# Altium PCB 底座.pcbdoc
Units mil, origin at the board's own origin, x right, y up, seen from the top; angles counter-clockwise.
Board outline 7862.43 x 6611.78 mil, 2 copper layers (Top Layer, Bottom Layer); 31 components, 22 nets, 132 pads, 562 vias.
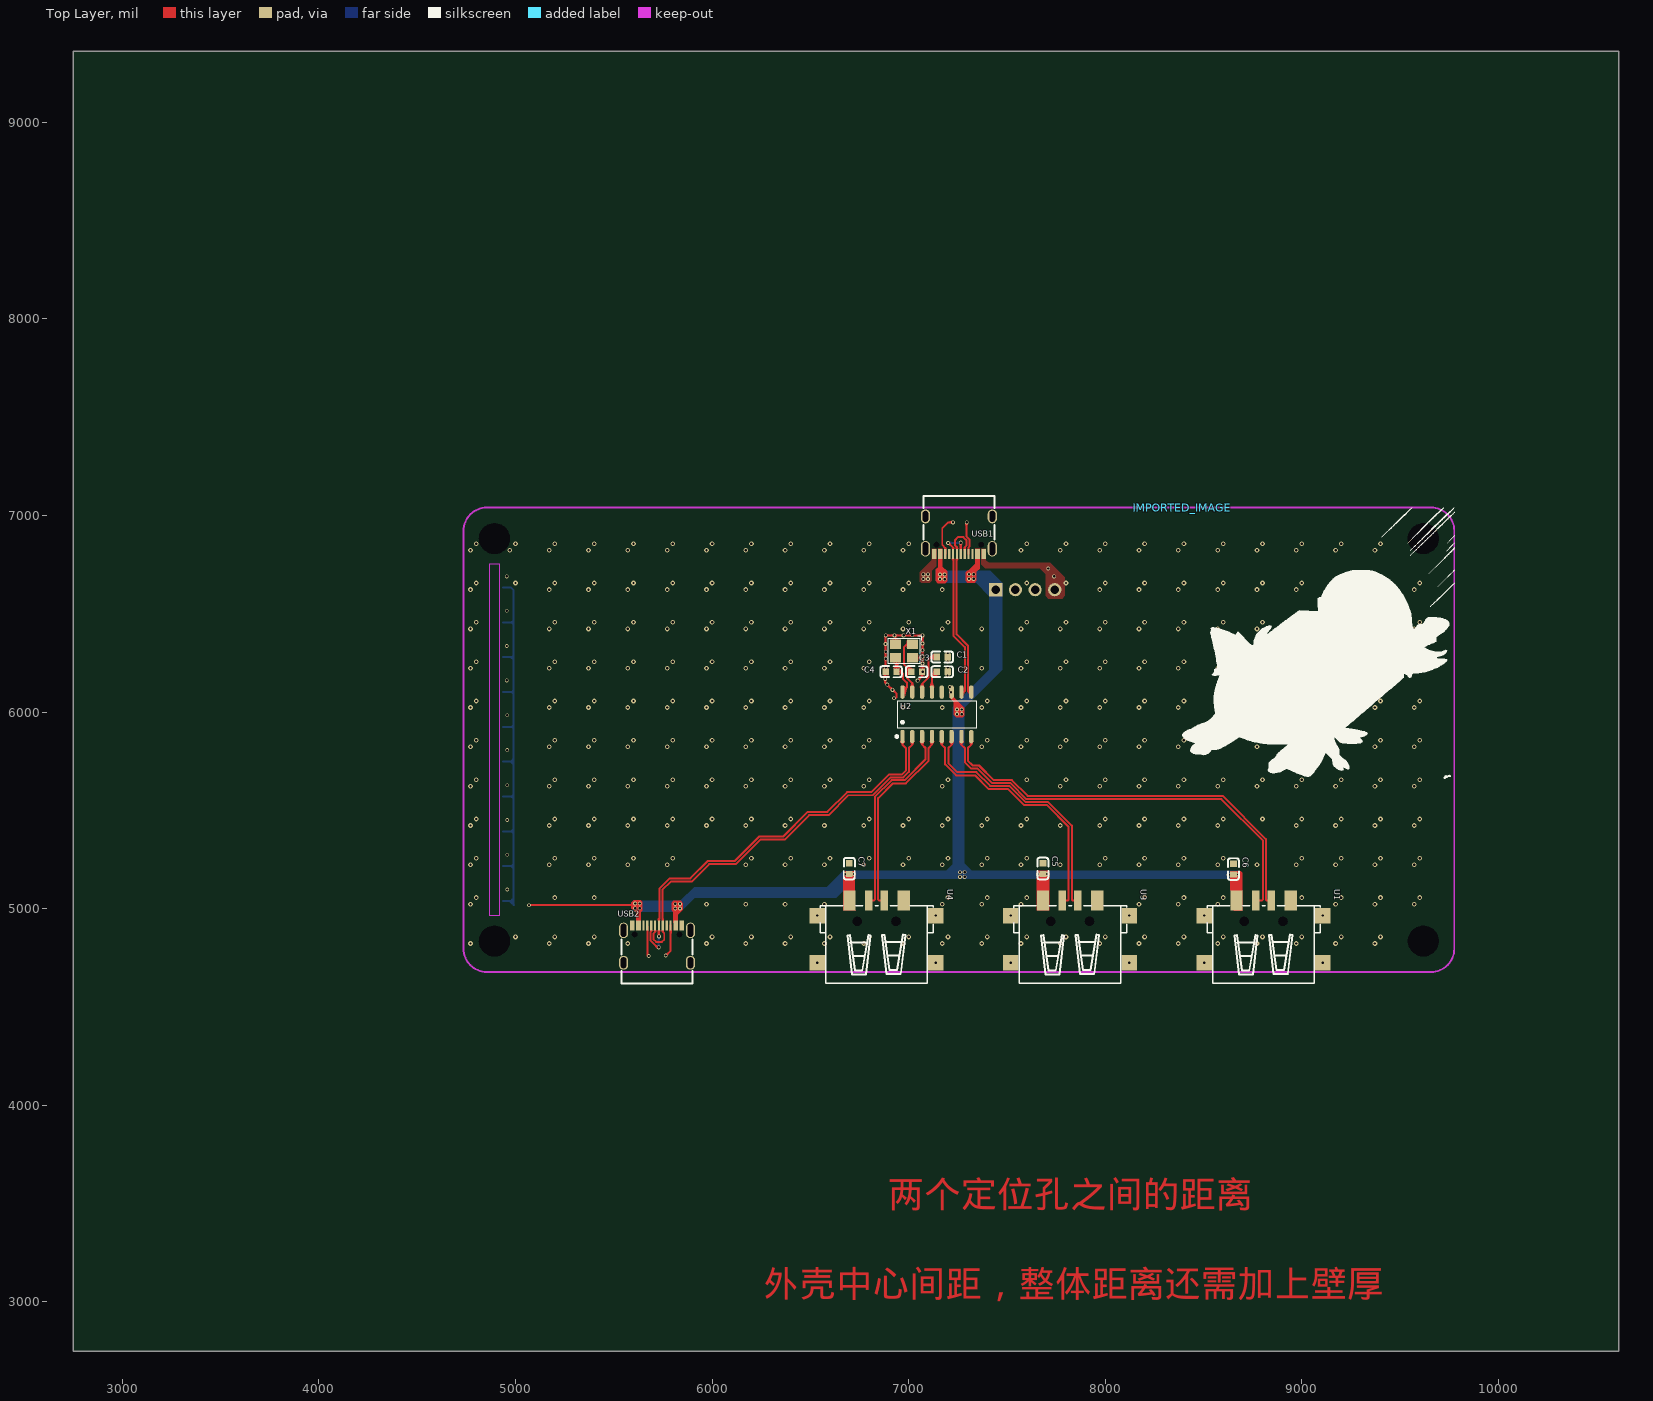
[diagram p0: Top Layer view]
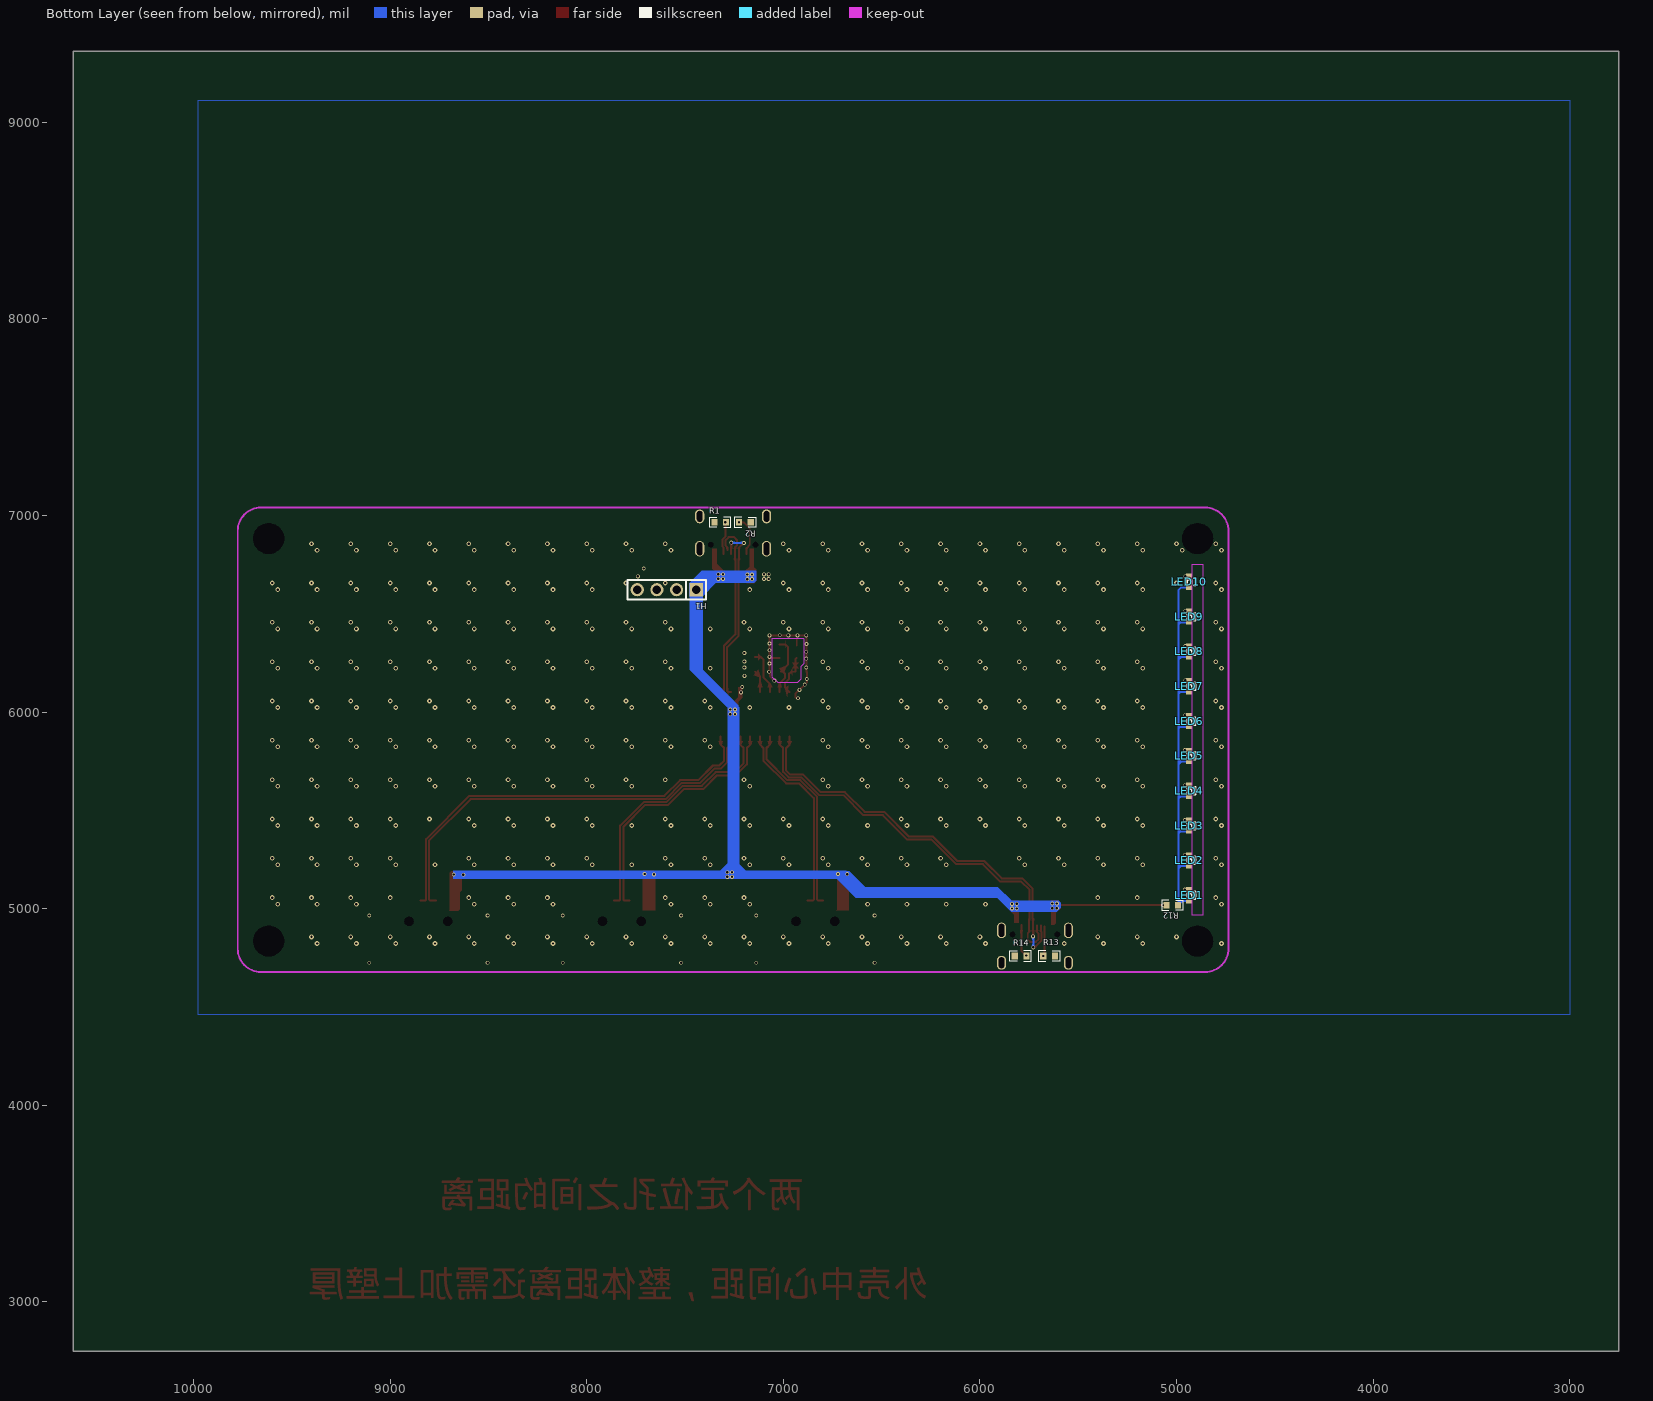
[diagram p1: Bottom Layer view, seen from below]

## Layer stack, top to bottom
Top Layer: signal copper (thickness not stored)
Dielectric: dielectric 12.6, FR-4, Dk 4.8
Bottom Layer: signal copper (thickness not stored)

## Board outline
10612.43,2750 2750,2750 2750,9361.78 10612.43,9361.78
cut-out: 4971.93,6882.52 ccw(c4893.19,6882.52) 4814.45,6882.52 ccw(c4893.19,6882.52)
cut-out: 4971.93,4835.28 ccw(c4893.19,4835.28) 4814.45,4835.28 ccw(c4893.19,4835.28)
cut-out: 9696.34,4835.28 ccw(c9617.6,4835.28) 9538.86,4835.28 ccw(c9617.6,4835.28)
cut-out: 9696.34,6882.52 ccw(c9617.6,6882.52) 9538.86,6882.52 ccw(c9617.6,6882.52)

## Components (designator, comment, footprint, x,y, rotation, side; value= is the part's Value field where it differs from the comment)
C1 "CAP_0603" C0603 7170.71,6280 r0 top
C2 "CAP_0603" C0603 7170.71,6205 r0 top
C3 "CAP_0603" C0603 7040.71,6205 r0 top
C4 "CAP_0603" C0603 6910.71,6205 r0 top
C5 "CAP_0603" C0603 7682.11,5203.75 r270 top
C6 "CAP_0603" C0603 8651.22,5201.04 r270 top
C7 "CAP_0603" C0603 6697.75,5203.43 r270 top
H1 "HDR-M_2.54_1x4P" HDR-TH_4P-P2.54-V-M 7593.04,6622.45 r0 bottom
IMPORTED_IMAGE "IMPORTED_IMAGE" IMPORTED_IMAGE 8390.71,7040 r0 top
LED1 "XL-1606UGC" LED-SMD_L1.7-W1.1-R-RD_GREEN 4936.43,5068.23 r270 bottom
LED2 "XL-1606UGC" LED-SMD_L1.7-W1.1-R-RD_GREEN 4936.43,5245.39 r270 bottom
LED3 "XL-1606UGC" LED-SMD_L1.7-W1.1-R-RD_GREEN 4936.43,5422.56 r270 bottom
LED4 "XL-1606UGC" LED-SMD_L1.7-W1.1-R-RD_GREEN 4936.43,5599.72 r270 bottom
LED5 "XL-1606UGC" LED-SMD_L1.7-W1.1-R-RD_GREEN 4936.43,5776.89 r270 bottom
LED6 "XL-1606UGC" LED-SMD_L1.7-W1.1-R-RD_GREEN 4936.43,5954.06 r270 bottom
LED7 "XL-1606UGC" LED-SMD_L1.7-W1.1-R-RD_GREEN 4936.43,6131.22 r270 bottom
LED8 "XL-1606UGC" LED-SMD_L1.7-W1.1-R-RD_GREEN 4936.43,6308.39 r270 bottom
LED9 "XL-1606UGC" LED-SMD_L1.7-W1.1-R-RD_GREEN 4936.43,6485.55 r270 bottom
LED10 "XL-1606UGC" LED-SMD_L1.7-W1.1-R-RD_GREEN 4936.43,6662.72 r270 bottom
R1 "Res_0603" R0603 7320.71,6965 r180 bottom
R2 "Res_0603" R0603 7195.71,6965 r0 bottom
R12 "Res_0603" R0603 5021.77,5017.79 r0 bottom
R13 "Res_0603" R0603 5648.12,4759.57 r0 bottom
R14 "Res_0603" R0603 5792.76,4759.43 r180 bottom
U1 "USB-SMT-AF10.0-13.1*6.8/6.3" USB-SMT-AF10.0-13.1*6.8/6.3 9066.42,4670 r270 top
U2 "SL2.1A" SOP-16_L10.0-W3.9-P1.27-LS6.0-BL 7143.53,5988.59 r0 top
U3 "USB母座" USB-SMT-AF10.0-13.1*6.8/6.3 8082.17,4670 r270 top
U4 "USB-SMT-AF10.0-13.1*6.8/6.3" USB-SMT-AF10.0-13.1*6.8/6.3 7097.92,4670 r270 top
USB1 "KH-TYPE-C-16P-T" USB-C-SMD_KH-TYPE-C-16P 7255.4,6900 r180 top
USB2 "KH-TYPE-C-16P-T" USB-C-SMD_KH-TYPE-C-16P 5719.97,4820 r0 top
X1 "X322512MSB4SI" OSC-SMD_4P-L3.2-W2.5-BL 6975.71,6310 r180 top

## Footprints (in the part's own frame and the unit in brackets; to place one, negate y for a bottom-side part, rotate by r counter-clockwise, add the part's x,y. Pads: shape width x height; smd on the part's side, far side on the other; paste and mask are expansions set on the pad)
C0603 [mm]
  rect 0.8x0.9 smd mask+0.051: 1(-0.7,0) 2(0.7,0)
  silkscreen extent -1.41,-0.71 1.39,0.72
HDR-TH_4P-P2.54-V-M [mm]
  rect 1.7x1.7 hole 1.1 paste+0 mask+0.051: 1(-3.81,0)
  round 1.7 hole 1.1 paste+0 mask+0.051: 2(-1.27,0) 3(1.27,0) 4(3.81,0)
  silkscreen extent -5.08,-1.27 5.08,1.27
IMPORTED_IMAGE [mil]
  silkscreen extent 0,-1379 1388,0
LED-SMD_L1.7-W1.1-R-RD_GREEN [mm]
  rect 0.6x0.8 smd mask+0.051: 1(0.75,0) 2(-0.75,0)
  silkscreen extent -0.49,-0.25 0.48,0.85
OSC-SMD_4P-L3.2-W2.5-BL [mm]
  rect 1.4x1.2 smd mask+0.051: 1(-1.1,-0.875) 2(1.1,-0.875) 3(1.1,0.875) 4(-1.1,0.875)
  silkscreen extent -2.29,-1.9 2.03,1.65
R0603 [mil]
  rect 31.75x34.02 smd paste-3937.01 mask+2: 1(-29.66,0) 2(29.66,0)
  silkscreen extent -55,-26 55,26
SOP-16_L10.0-W3.9-P1.27-LS6.0-BL [mm]
  oval 0.56x1.745 smd mask+0.051: 1(-4.445,-2.872) 2(-3.175,-2.872) 3(-1.905,-2.872) 4(-0.635,-2.872) 5(0.635,-2.872) 6(1.905,-2.872) 7(3.175,-2.872) 8(4.445,-2.872) 9(4.445,2.872) 10(3.175,2.872) 11(1.905,2.872) 12(0.635,2.872) 13(-0.635,2.872) 14(-1.905,2.872) 15(-3.175,2.872) 16(-4.445,2.872)
  silkscreen extent -5.33,-3.02 5.08,1.77
USB-C-SMD_KH-TYPE-C-16P [mm]
  oval 1.2x2 hole 0.7 slot 1.7 at 90 deg mask+0.051: 1(-4.32,1.765) 2(4.32,1.765)
  oval 1.2x1.8 hole 0.7 slot 1.4 at 90 deg mask+0.051: 3(-4.32,-2.415) 4(4.32,-2.415)
  rect 0.3x1.3 smd paste-100 mask+0.05: A1(-3.35,2.415) A4(-2.55,2.415) A5(-1.25,2.415) A6(-0.25,2.415) A7(0.25,2.415) A8(1.25,2.415) A9(2.55,2.415) A12(3.35,2.415) B1(3.05,2.415) B4(2.25,2.415) B5(1.75,2.415) B6(0.75,2.415) B7(-0.75,2.415) B8(-1.75,2.415) B9(-2.25,2.415) B12(-3.05,2.415)
  Multi-Layer board cut-out: -3.24,1.235 -3.205,1.083 -3.108,0.961 -2.968,0.894 -2.812,0.894 -2.672,0.961 -2.575,1.083 -2.54,1.235 -2.54,1.235 -2.575,1.387 -2.672,1.509 -2.812,1.576 -2.968,1.576 -3.108,1.509 -3.205,1.387 -3.24,1.235
  Multi-Layer board cut-out: 2.54,1.235 2.575,1.083 2.672,0.961 2.812,0.894 2.968,0.894 3.108,0.961 3.205,1.083 3.24,1.235 3.24,1.235 3.205,1.387 3.108,1.509 2.968,1.576 2.812,1.576 2.672,1.509 2.575,1.387 2.54,1.235
  silkscreen extent -4.57,-5.08 4.57,0.57
USB-SMT-AF10.0-13.1*6.8/6.3 [mm]
  rect 2.6x1.6 smd paste+0 mask+0.102: 1(-9.443,-10.134) 4(-9.443,-3.134)
  rect 2.6x1 smd paste+0 mask+0.102: 2(-9.443,-7.634) 3(-9.443,-5.634)
  rect 2x2 smd paste+0 mask+0.102: 5(-7.493,1.016) 6(-1.393,1.016) 7(-1.393,-14.284) 8(-7.493,-14.284)
  Multi-Layer board cut-out: -6.743,-3.534 -7.003,-3.593 -7.212,-3.76 -7.328,-4 -7.328,-4.268 -7.212,-4.508 -7.003,-4.675 -6.743,-4.734 -6.743,-4.734 -6.483,-4.675 -6.274,-4.508 -6.158,-4.268 -6.158,-4 -6.274,-3.76 -6.483,-3.593 -6.743,-3.534
  Multi-Layer board cut-out: -6.743,-8.534 -7.003,-8.593 -7.212,-8.76 -7.328,-9 -7.328,-9.268 -7.212,-9.508 -7.003,-9.675 -6.743,-9.734 -6.743,-9.734 -6.483,-9.675 -6.274,-9.508 -6.158,-9.268 -6.158,-9 -6.274,-8.76 -6.483,-8.593 -6.743,-8.534
  silkscreen extent -8.74,-13.93 1.26,0.67

## Via types
v1: diameter 24, hole 12, Top Layer to Bottom Layer, 470 vias
v2: diameter 19.68, hole 11.81, Top Layer to Bottom Layer, 92 vias

## Nets (pads, with @x,y where several pads share a name; then routed paths per layer and width w, separated by ;. In a path a pad name is that pad's centre, name@x,y a point inside that pad or via, vN(x,y) a via of type N, cw(c..) or ccw(c..) an arc to the next point about the centre after c; other vN are vias at no path point)
1_D+: U1.3 U2.8 | length 2148.6
  Top Layer w10: U2.8 7318.53,5834.15 7301.53,5817.15 7301.53,5751.49 7324.94,5728.08 7357.71,5728.08 7431.68,5654.11 7524.73,5654.11 7605.46,5573.38 8597.28,5573.38 8817.23,5353.43 8817.23,5045.31 8820.77,5041.77 U1.3
1_D-: U1.2 U2.7 | length 2156.6
  Top Layer w10: U2.7 7268.53,5834.15 7285.53,5817.15 7285.53,5744.86 7318.31,5712.08 7350.57,5712.08 7424.54,5638.11 7518.1,5638.11 7598.83,5557.38 8590.65,5557.38 8801.23,5346.8 8801.23,5045.31 8797.69,5041.77 U1.2
2_D+: U2.6 U3.3 | length 1310.8
  Top Layer w10: U2.6 7218.53,5834.15 7201.53,5817.15 7201.53,5740.58 7247.66,5694.45 7343.92,5694.45 7414.27,5624.1 7512.3,5624.1 7593.03,5543.37 7708.36,5543.37 7829.88,5421.85 7829.88,5045.31 7833.41,5041.77 U3.3
2_D-: U2.5 U3.2 | length 1312.6
  Top Layer w10: U2.5 7168.53,5834.15 7185.53,5817.15 7185.53,5733.95 7241.03,5678.45 7337.29,5678.45 7407.64,5608.1 7505.67,5608.1 7586.4,5527.37 7701.73,5527.37 7813.88,5415.22 7813.88,5045.31 7810.34,5041.77 U3.2
3_D+: U2.4 U4.3 | length 1015.1
  Top Layer w10: U4.3 6848.04,5041.77 6844.51,5045.31 6844.51,5561.66 6920.3,5637.46 6985.75,5637.46 7101.53,5753.24 7101.53,5817.15 7118.53,5834.15 U2.4
3_D-: U2.3 U4.2 | length 1014.6
  Top Layer w10: U4.2 6824.97,5041.77 6828.51,5045.31 6828.51,5568.29 6913.68,5653.46 6979.12,5653.46 7085.53,5759.86 7085.53,5817.15 7068.53,5834.15 U2.3
4_D+: U2.2 USB2.A6 USB2.B6 | length 2084.6
  Top Layer w10: USB2.A6 5710.13,4881.7 5701.79,4873.36 5701.79,4844.91 5715.56,4831.14 5744.93,4831.14 5756.77,4842.99 5756.77,4874.07 5749.5,4881.35 USB2.B6 5749.5,4947.64 5747.65,4949.48 5747.65,5095.05 5790.54,5137.94 5896.79,5137.94 5985.21,5226.36 6121.15,5226.36 6245.71,5350.91 6368.85,5350.91 6494.07,5476.13 6593.05,5476.13 6693.66,5576.74 6817.14,5576.74 6907.87,5667.47 6973.32,5667.47 7001.53,5695.68 7001.53,5817.15 7018.53,5834.15 U2.2
4_D-: U2.1 USB2.A7 USB2.B7 | length 2118.9
  Top Layer w10: USB2.B7 5690.44,4884.63 5685.79,4879.99 5685.79,4838.28 5720.96,4803.12 v2(5728.52,4803.12) ; v2(5729.95,4859.09) 5729.95,4914.93 USB2.A7 5729.81,4947.64 5731.65,4949.48 5731.65,5101.68 5783.91,5153.94 5890.16,5153.94 5978.58,5242.36 6114.52,5242.36 6239.08,5366.91 6362.23,5366.91 6487.44,5492.13 6586.42,5492.13 6687.03,5592.74 6810.51,5592.74 6901.24,5683.47 6966.69,5683.47 6985.53,5702.31 6985.53,5817.15 6968.53,5834.15 U2.1
  Bottom Layer w10: v2(5728.52,4803.12) 5728.52,4857.66 v2(5729.95,4859.09)
$1N7576: LED1.1 LED2.1 LED3.1 LED4.1 LED5.1 LED6.1 LED7.1 LED8.1 LED9.1 LED10.1 R12.1 | length 2476.3
  Bottom Layer w10: LED1.1 4971.2,5038.69 ; LED2.1 4978.93,5215.86 ; LED3.1 4978.61,5393.02 ; LED4.1 4979.56,5570.19 ; LED5.1 4974.94,5747.36 ; LED6.1 4980.11,5924.52 ; LED7.1 4980.11,6101.69 ; LED8.1 4976.93,6278.85 ; LED9.1 4978.75,6456.02 ; LED10.1 4977.53,6633.18 4990.71,6620 4990.71,6467.71 ; R12.1 R12.1@4990.71,5019.18 ; 4971.2,5038.69 4976.73,5038.69 4984.86,5046.82 ; 4971.2,5038.69 R12.1@4984.86,5025.04 ; 4974.94,5747.36 4990.44,5731.85 4990.71,5731.85 ; 4974.94,5747.36 4990.71,5747.36 ; 4974.94,5747.36 4988.17,5760.58 4990.71,5760.58 ; 4976.93,6278.85 4990.71,6265.06 ; 4976.93,6278.85 4980.35,6278.85 ; 4978.61,5393.02 4990.71,5380.92 ; 4978.61,5393.02 4990.71,5393.02 ; 4978.61,5393.02 4990.71,5405.13 ; 4978.75,6456.02 4990.71,6444.05 ; 4978.75,6456.02 4979.02,6456.02 ; 4978.93,5215.86 4990.71,5204.07 ; 4978.93,5215.86 4990.71,5215.86 ; 4978.93,5215.86 4990.49,5227.41 4990.71,5227.41 ; 4979.02,6456.02 4990.71,6467.71 ; 4979.02,6456.02 4990.71,6456.02 ; 4979.56,5570.19 4990.71,5559.04 ; 4979.56,5570.19 4990.71,5570.19 ; 4979.56,5570.19 4990.71,5581.34 ; 4980.11,5924.52 4990.71,5913.92 ; 4980.11,5924.52 4990.71,5924.52 ; 4980.11,5924.52 4990.71,5935.12 ; 4980.11,6101.69 4990.71,6091.08 ; 4980.11,6101.69 4990.71,6101.69 ; 4980.11,6101.69 4990.71,6112.29 ; 4980.35,6278.85 4990.71,6289.22 ; 4980.35,6278.85 4990.71,6278.85 ; R12.1@4984.86,5025.04 4984.86,5046.82 ; R12.1@4984.86,5025.04 R12.1@4990.71,5019.18 ; 4984.86,5046.82 4990.71,5052.68 ; R12.1@4990.71,5019.18 4990.71,5052.68 ; 4990.71,5052.68 4990.71,5204.07 ; 4990.71,5204.07 4990.71,5215.86 ; 4990.71,5215.86 4990.71,5227.41 ; 4990.71,5227.41 4990.71,5380.92 ; 4990.71,5380.92 4990.71,5393.02 ; 4990.71,5393.02 4990.71,5405.13 ; 4990.71,5405.13 4990.71,5559.04 ; 4990.71,5559.04 4990.71,5570.19 ; 4990.71,5570.19 4990.71,5581.34 ; 4990.71,5581.34 4990.71,5731.85 ; 4990.71,5731.85 4990.71,5747.36 ; 4990.71,5747.36 4990.71,5760.58 ; 4990.71,5760.58 4990.71,5913.92 ; 4990.71,5913.92 4990.71,5924.52 ; 4990.71,5924.52 4990.71,5935.12 ; 4990.71,5935.12 4990.71,6091.08 ; 4990.71,6091.08 4990.71,6101.69 ; 4990.71,6101.69 4990.71,6112.29 ; 4990.71,6112.29 4990.71,6265.06 ; 4990.71,6265.06 4990.71,6278.85 ; 4990.71,6278.85 4990.71,6289.22 ; 4990.71,6289.22 4990.71,6444.05 ; 4990.71,6444.05 4990.71,6456.02 ; 4990.71,6456.02 4990.71,6467.71
+5V: C5.2 C6.2 C7.2 H1.1 R12.2 U1.1 U2.11 U3.1 U4.1 USB1.A4 USB1.A9 USB1.B4 USB1.B9 USB2.A4 USB2.A9 USB2.B4 USB2.B9 | length 529
  Top Layer w10: v2(5068.51,5017.45) 5594.01,5017.45 ; v2(7215.71,6100) 7216.84,6100 U2.11
  other v2: 5812.85,5000.86 5836.48,5000.86 5608.83,5002.31 5632.45,5002.31 5812.85,5024.48 5836.48,5024.48 5608.83,5025.93 5632.45,5025.93 7261.11,5161.47 7284.73,5161.47 8627.38,5172.32 8676.24,5174.02 7658.08,5174.57 6675.01,5175.54 6722.11,5176.06 7705.58,5175.94 7261.11,5185.09 7284.73,5185.09 7246.06,5989.38 7269.68,5989.38 7246.06,6013 7269.68,6013 7208.72,6127.27 7159.24,6676.09 7182.87,6676.09 7306.88,6677.28 7330.5,6677.28 7159.24,6699.72 7182.87,6699.72 7306.88,6700.9 7330.5,6700.9
CC1: R1.2 USB1.A5 | length 173.4
  Top Layer w10: v2(7295.71,6965) 7293.98,6963.27 7293.98,6893.27 7308.89,6878.36 7308.89,6842.28 7304.61,6838 USB1.A5
  Bottom Layer w10: R1.2 v2(7295.71,6965)
CC1_#: R13.2 USB2.A5 | length 154.4
  Top Layer w10: USB2.A5@5670.38,4910.15 5670.38,4766.63 v2(5678.07,4758.94)
CC2: R2.2 USB1.B5 | length 204.4
  Top Layer w10: USB1.B5 7186.5,6834.22 7170.71,6850 7170.71,6935 7200.71,6965 v2(7225.71,6965)
  Bottom Layer w10: R2.2 v2(7225.71,6965)
CC2_#: R14.2 USB2.B5 | length 165.7
  Top Layer w10: v2(5764.69,4761.51) 5789.47,4786.28 USB2.B5@5789.47,4916.99
GND: C1.2 C2.2 C3.2 C4.1 C5.1 C6.1 C7.1 H1.4 LED1.2 LED2.2 LED3.2 LED4.2 LED5.2 LED6.2 LED7.2 LED8.2 LED9.2 LED10.2 R1.1 R2.1 R13.1 R14.1 U1.4 U1.5 U1.6 U1.7 U1.8 U2.12 U3.4 U3.5 U3.6 U3.7 U3.8 U4.4 U4.5 U4.6 U4.7 U4.8 USB1.1 USB1.2 USB1.3 USB1.4 USB1.A1 USB1.A12 USB1.B1 USB1.B12 USB2.1 USB2.2 USB2.3 USB2.4 USB2.A1 USB2.A12 USB2.B1 USB2.B12 X1.2 X1.4 | length 874.4
  Top Layer w10: X1.2@6931.76,6339.56 6931.76,6386.18 v2(6927.94,6390) ; 6938.27,6075 6938.27,6092.44 v2(6917.82,6112.9) v2(6891.1,6139.61) 6880.71,6150 v2(6880.71,6168.49) 6880.71,6202.56 C4.1 v2(6883.15,6226.61) v2(6883.15,6271.61) v2(6883.15,6306.76) 6882.11,6307.8 v2(6882.11,6346.39) 6882.11,6388.96 v2(6883.15,6390) v2(6927.94,6390) ; X1.4@7019.32,6275.36 7065.56,6275.36 v2(7070.71,6280.51) ; v2(7045.71,6160) 7068.27,6182.56 C3.2 7070.71,6207.44 v2(7070.71,6247.23) v2(7070.71,6280.51) ; v2(6927.94,6390) v2(6974.19,6390) 6974.5,6390.31 v2(7017.93,6390.31) 7070.4,6390.31 v2(7070.71,6390) v2(7070.71,6348.48) v2(7070.71,6314.26) v2(7070.71,6280.51)
  other v1: 4771.44,4822.97 5171.44,4822.97 5371.44,4822.97 5571.44,4822.97 5971.44,4822.97 6171.44,4822.97 6371.44,4822.97 6571.44,4822.97 6771.44,4822.97 6971.44,4822.97 7171.44,4822.97 7371.44,4822.97 7571.44,4822.97 7771.44,4822.97 7971.44,4822.97 8171.44,4822.97 8371.44,4822.97 8571.44,4822.97 8771.44,4822.97 8971.44,4822.97 9171.44,4822.97 9371.44,4822.97 5000,4856.35 5200,4856.35 5400,4856.35 6000,4856.35 6200,4856.35 6400,4856.35 6600,4856.35 6800,4856.35 7000,4856.35 7200,4856.35 7400,4856.35 7600,4856.35 7800,4856.35 8000,4856.35 8200,4856.35 8400,4856.35 8600,4856.35 8800,4856.35 9000,4856.35 9200,4856.35 9400,4856.35 4771.44,5022.97 5971.44,5022.97 6171.44,5022.97 6371.44,5022.97 6571.44,5022.97 7171.44,5022.97 7371.44,5022.97 7571.44,5022.97 8171.44,5022.97 8371.44,5022.97 8571.44,5022.97 9171.44,5022.97 9371.44,5022.97 9571.44,5022.97 4800,5056.35 5200,5056.35 5400,5056.35 7200,5056.35 7400,5056.35 7600,5056.35 8200,5056.35 8400,5056.35 8600,5056.35 9000,5056.35 9200,5056.35 9400,5056.35 9600,5056.35 4771.44,5222.97 5171.44,5222.97 5371.44,5222.97 5571.44,5222.97 5771.44,5222.97 6171.44,5222.97 6371.44,5222.97 6571.44,5222.97 6771.44,5222.97 6971.44,5222.97 7171.44,5222.97 7371.44,5222.97 7571.44,5222.97 7771.44,5222.97 7971.44,5222.97 8171.44,5222.97 8371.44,5222.97 8571.44,5222.97 8771.44,5222.97 8971.44,5222.97 9171.44,5222.97 9371.44,5222.97 9571.44,5222.97 4800,5256.35 5200,5256.35 5400,5256.35 5600,5256.35 5800,5256.35 6200,5256.35 6400,5256.35 6600,5256.35 6800,5256.35 7000,5256.35 7200,5256.35 7400,5256.35 7600,5256.35 8000,5256.35 8200,5256.35 8400,5256.35 8600,5256.35 9000,5256.35 9200,5256.35 9400,5256.35 9600,5256.35 4771.44,5422.97 5171.44,5422.97 5371.44,5422.97 5571.44,5422.97 5771.44,5422.97 5971.44,5422.97 6171.44,5422.97 6371.44,5422.97 6571.44,5422.97 6771.44,5422.97 6971.44,5422.97 7171.44,5422.97 7371.44,5422.97 7571.44,5422.97 7771.44,5422.97 7971.44,5422.97 8171.44,5422.97 8371.44,5422.97 8571.44,5422.97 8971.44,5422.97 9171.44,5422.97 9371.44,5422.97 9571.44,5422.97 4800,5456.35 5200,5456.35 5400,5456.35 5600,5456.35 5800,5456.35 6000,5456.35 6200,5456.35 6400,5456.35 6800,5456.35 7000,5456.35 7200,5456.35 7400,5456.35 7600,5456.35 8000,5456.35 8200,5456.35 8400,5456.35 8600,5456.35 8800,5456.35 9000,5456.35 9200,5456.35 9400,5456.35 9600,5456.35 4771.44,5622.97 5171.44,5622.97 5371.44,5622.97 5571.44,5622.97 5771.44,5622.97 5971.44,5622.97 6171.44,5622.97 6371.44,5622.97 6571.44,5622.97 6771.44,5622.97 7171.44,5622.97 7771.44,5622.97 7971.44,5622.97 8171.44,5622.97 8371.44,5622.97 8571.44,5622.97 8771.44,5622.97 8971.44,5622.97 9171.44,5622.97 9371.44,5622.97 9571.44,5622.97 4800,5656.35 5200,5656.35 5400,5656.35 5600,5656.35 5800,5656.35 6000,5656.35 6200,5656.35 6400,5656.35 6600,5656.35 6800,5656.35 7200,5656.35 7600,5656.35 7800,5656.35 8000,5656.35 8200,5656.35 8400,5656.35 8600,5656.35 8800,5656.35 9000,5656.35 9200,5656.35 9400,5656.35 9600,5656.35 4771.44,5822.97 5171.44,5822.97 5371.44,5822.97 5571.44,5822.97 5771.44,5822.97 5971.44,5822.97 6171.44,5822.97 6371.44,5822.97 6571.44,5822.97 6771.44,5822.97 7371.44,5822.97 7571.44,5822.97 7771.44,5822.97 7971.44,5822.97 8171.44,5822.97 8371.44,5822.97 8571.44,5822.97 8771.44,5822.97 8971.44,5822.97 9171.44,5822.97 9371.44,5822.97 9571.44,5822.97 4800,5856.35 5200,5856.35 5400,5856.35 5600,5856.35 5800,5856.35 6000,5856.35 6200,5856.35 6400,5856.35 6600,5856.35 6800,5856.35 7400,5856.35 7600,5856.35 7800,5856.35 8000,5856.35 8200,5856.35 8400,5856.35 8600,5856.35 8800,5856.35 9000,5856.35 9200,5856.35 9400,5856.35 9600,5856.35 4771.44,6022.97 5171.44,6022.97 5371.44,6022.97 5571.44,6022.97 5771.44,6022.97 5971.44,6022.97 6171.44,6022.97 6371.44,6022.97 6571.44,6022.97 6771.44,6022.97 6971.44,6022.97 7171.44,6022.97 7371.44,6022.97 7571.44,6022.97 7771.44,6022.97 7971.44,6022.97 8171.44,6022.97 8371.44,6022.97 8571.44,6022.97 8771.44,6022.97 8971.44,6022.97 9171.44,6022.97 9371.44,6022.97 9571.44,6022.97 4800,6056.35 5200,6056.35 5400,6056.35 5600,6056.35 5800,6056.35 6000,6056.35 6200,6056.35 6400,6056.35 6600,6056.35 6800,6056.35 7400,6056.35 7600,6056.35 7800,6056.35 8000,6056.35 8200,6056.35 8400,6056.35 8600,6056.35 8800,6056.35 9000,6056.35 9200,6056.35 9400,6056.35 9600,6056.35 4771.44,6222.97 5171.44,6222.97 5371.44,6222.97 5571.44,6222.97 5771.44,6222.97 5971.44,6222.97 6171.44,6222.97 6371.44,6222.97 6571.44,6222.97 6771.44,6222.97 7371.44,6222.97 7571.44,6222.97 7771.44,6222.97 7971.44,6222.97 8171.44,6222.97 8371.44,6222.97 8571.44,6222.97 8771.44,6222.97 8971.44,6222.97 9171.44,6222.97 9371.44,6222.97 9571.44,6222.97 4800,6256.35 5200,6256.35 5400,6256.35 5600,6256.35 5800,6256.35 6000,6256.35 6200,6256.35 6400,6256.35 6600,6256.35 6800,6256.35 7600,6256.35 7800,6256.35 8000,6256.35 8200,6256.35 8400,6256.35 8600,6256.35 8800,6256.35 9000,6256.35 9200,6256.35 9400,6256.35 9600,6256.35 4771.44,6422.97 5171.44,6422.97 5371.44,6422.97 5571.44,6422.97 5771.44,6422.97 5971.44,6422.97 6171.44,6422.97 6371.44,6422.97 6571.44,6422.97 6771.44,6422.97 6971.44,6422.97 7171.44,6422.97 7371.44,6422.97 7571.44,6422.97 7771.44,6422.97 7971.44,6422.97 8171.44,6422.97 8371.44,6422.97 8571.44,6422.97 8771.44,6422.97 8971.44,6422.97 9171.44,6422.97 9371.44,6422.97 9571.44,6422.97 4800,6456.35 5200,6456.35 5400,6456.35 5600,6456.35 5800,6456.35 6000,6456.35 6200,6456.35 6400,6456.35 6600,6456.35 6800,6456.35 7000,6456.35 7200,6456.35 7600,6456.35 7800,6456.35 8000,6456.35 8200,6456.35 8400,6456.35 8600,6456.35 8800,6456.35 9000,6456.35 9200,6456.35 9400,6456.35 9600,6456.35 4771.44,6622.97 5171.44,6622.97 5371.44,6622.97 5571.44,6622.97 5771.44,6622.97 5971.44,6622.97 6171.44,6622.97 6371.44,6622.97 6571.44,6622.97 6771.44,6622.97 6971.44,6622.97 7171.44,6622.97 7971.44,6622.97 8171.44,6622.97 8371.44,6622.97 8571.44,6622.97 8771.44,6622.97 8971.44,6622.97 9171.44,6622.97 9371.44,6622.97 9571.44,6622.97 4800,6656.35 5000,6656.35 5200,6656.35 5400,6656.35 5600,6656.35 5800,6656.35 6000,6656.35 6200,6656.35 6400,6656.35 6600,6656.35 6800,6656.35 7000,6656.35 7600,6656.35 7800,6656.35 8000,6656.35 8200,6656.35 8400,6656.35 8600,6656.35 8800,6656.35 9000,6656.35 9200,6656.35 9400,6656.35 9600,6656.35 4771.44,6822.97 4971.44,6822.97 5171.44,6822.97 5371.44,6822.97 5571.44,6822.97 5771.44,6822.97 5971.44,6822.97 6171.44,6822.97 6371.44,6822.97 6571.44,6822.97 6771.44,6822.97 6971.44,6822.97 7571.44,6822.97 7771.44,6822.97 7971.44,6822.97 8171.44,6822.97 8371.44,6822.97 8571.44,6822.97 8771.44,6822.97 8971.44,6822.97 9171.44,6822.97 9371.44,6822.97 4800,6856.35 5000,6856.35 5200,6856.35 5400,6856.35 5600,6856.35 5800,6856.35 6000,6856.35 6200,6856.35 6400,6856.35 6600,6856.35 6800,6856.35 7000,6856.35 7600,6856.35 7800,6856.35 8000,6856.35 8200,6856.35 8400,6856.35 8600,6856.35 8800,6856.35 9000,6856.35 9200,6856.35 9400,6856.35
  other v2: 6535.56,4724.84 7137.92,4724.84 7519.81,4724.84 8122.17,4724.84 8504.06,4724.84 9106.42,4724.84 6535.56,4965 7137.92,4965 7519.81,4965 8122.17,4965 8504.06,4965 9106.42,4965 4957.96,5097.59 4957.96,5273.97 4957.96,5450.81 4957.96,5627.65 4957.96,5806.42 4957.96,5983.58 6925.71,6070 4955.71,6161.1 7197.5,6183.96 7072.21,6205 7198.27,6226.25 7198.27,6257.29 7198.27,6300.41 4955.71,6336.36 4955.71,6515 7074.83,6676.48 7098.45,6676.48 4955.71,6690 7739.99,6690 7074.83,6700.11 7098.45,6700.11 7710.09,6730.42
IN_D+: U2.10 USB1.A6 USB1.B6 | length 931.7
  Top Layer w10: v2(7200.71,6860) 7225.87,6834.85 USB1.B6 7225.87,6772.36 7227.71,6770.52 7227.71,6388.55 7285.85,6330.42 7285.85,6106.63 7282.31,6103.09 U2.10@7265.71,6103.09 ; v2(7264.83,6861.49) 7265.24,6861.08 USB1.A6
  Bottom Layer w10: v2(7200.71,6860) 7263.34,6860 v2(7264.83,6861.49)
IN_D-: U2.9 USB1.A7 USB1.B7 | length 938
  Top Layer w10: USB1.B7@7284.32,6823.39 7284.32,6837.53 7294.88,6848.09 7294.88,6872.55 7278.21,6889.22 7250.44,6889.22 7235.56,6874.34 7235.56,6848.87 7245.56,6838.87 USB1.A7 7245.56,6772.36 7243.71,6770.52 7243.71,6395.17 7301.85,6337.04 7301.85,6106.63 7305.38,6103.09 U2.9@7315.71,6103.09
VDD18: C1.1 U2.14 | length 225.3
  Top Layer w10: U2.14 7068.53,6143.03 7100.71,6175.22 7100.71,6265 7115.71,6280 C1.1
VDD33: C2.1 U2.13 | length 113.5
  Top Layer w10: U2.13 7118.53,6180.37 C2.1
XIN: C4.2 U2.16 X1.3 | length 220.4
  Top Layer w10: X1.3 6938.27,6269.68 C4.2 6960.71,6205 6970.71,6195 6970.71,6170 6990.71,6150 6990.71,6123.87 U2.16
XOUT: C3.1 U2.15 X1.1 | length 321.2
  Top Layer w10: U2.15 7018.53,6147.19 6990.71,6175 6990.71,6195 7000.71,6205 C3.1 6975.71,6242.44 6975.71,6330 6990.16,6344.45 X1.1
"": H1.2 H1.3 USB1.A8 USB1.B8 USB2.A8 USB2.B8

## Polygon pours and split planes (outlines as drawn)
GND on Top Layer (hatched 45Degree grid 20 track 10, remove dead copper, pour order 0): 4411.44,4222.97 10362.43,4222.97 10362.43,7966.95 4411.44,7966.95
GND on Bottom Layer (solid, remove dead copper, pour order 1): 3000,4461.35 9975.67,4461.35 9975.67,9111.78 3000,9111.78

## Keep-outs
Top Layer:
  region net "": 4865.56,4965.43 4920.05,4965.43 4920.05,6752.99 4865.56,6752.99
Bottom Layer:
  region net "": 4865.56,4965.43 4920.05,4965.43 4920.05,6752.99 4865.56,6752.99
  region net "": 6896.89,6373.52 6896.89,6245.16 6896.74,6245.01 6911.75,6230 6911.75,6166.95 6929.86,6148.84 7026.57,6148.84 7055.27,6177.54 7055.27,6374.33 7054.67,6374.94 6898.3,6374.94 6896.94,6373.58
Board Outline Layer:
  lines w10 net "": 4735.71,4795.91 ccw(c4853.82,4795.91) 4853.82,4677.8 9656.97,4677.8 ccw(c9656.97,4795.91) 9775.08,4795.91 9775.08,6921.89 ccw(c9656.97,6921.89) 9656.97,7040 4853.82,7040 ccw(c4853.82,6921.89) 4735.71,6921.89 4735.71,4795.91

## Other copper
Top Layer:
  region net +5V: 7149.67,6830.69 7149.8,6830.69 7149.76,6830.74
  region net +5V: 7149.8,6830.69 7171.89,6830.69 7172.03,6830.83 7172.03,6738.82 7195.83,6715.02 7195.83,6665.16 7186.95,6656.28 7149.03,6656.28 7138.41,6666.9 7138.41,6725.23 7150.28,6737.11 7150.28,6830.21
  region net +5V: 7338.67,6830.28 7360.61,6830.28 7360.61,6729.15 7344.18,6712.71 7344.18,6666.67 7335.64,6658.13 7298.76,6658.13 7289.18,6667.71 7289.18,6710.42 7296.68,6717.92 7301.89,6717.92 7339.18,6755.21 7339.18,6829.72 7338.66,6830.25
  region net +5V: 7208.72,6127.26 7228.76,6127.26 7229.37,6126.66 7229.37,6075.25 7282.6,6022.01 7282.6,5980.55 7274.86,5972.81 7240.91,5972.81 7228.61,5985.11 7228.61,6052.21 7208.72,6072.1
  region net +5V: 6679.74,5191.48 6725.99,5191.48 6726.9,5190.57 6726.9,4993.97 6729.64,4991.23 6669.72,4991.23 6668.13,4992.83 6668.13,5182.82 6676.55,5191.25 6679.97,5191.25
  region net +5V: 6679.97,5191.25 6684.76,5191.25 6686.58,5189.43 6681.79,5189.43
  region net +5V: 7652.77,4990.76 7714.28,4990.76 7714.96,4991.44 7714.96,5193.28 7714.5,5193.74 7655.96,5193.74 7652.08,5189.87 7652.08,4991.44
  region net +5V: 8634.3,5189.98 8634.43,5189.98 8634.35,5190.05
  region net +5V: 8634.43,5189.98 8689.89,5189.98 8697.4,5182.46 8697.4,4991.32 8698.31,4990.41 8652.98,4990.41 8645.46,4997.93 8645.46,5083.36 8635.67,5093.16 8635.67,5188.74
  region net +5V: 5636.54,4918 5636.54,4982.25 5644.75,4990.45 5644.75,5035.1 5637,5042.84 5601.23,5042.84 5589.39,5031 5589.39,5003.2 5614.67,4977.92 5614.67,4925.29 5621.96,4918
  region net +5V: 5823.22,5039.47 5839.48,5039.47 5851.16,5027.79 5851.16,4994.99 5826.21,4970.04 5826.21,4928.69 5803.66,4928.69 5803.32,4928.35 5803.32,4970.04 5803.66,4970.38 5803.66,4982.69 5794.77,4991.57 5794.77,5030.87 5803.66,5039.75 5822.93,5039.75
  region net IN_D-: 7279.32,6837.53 7279.02,6830.51 7290.83,6830.51 7289.32,6837.53
  region net IN_D+: 7260.24,6845.51 7259.33,6830.51 7271.14,6830.51 7270.24,6845.51
  region net IN_D-: 7250.56,6838.87 7240.56,6838.87 7239.65,6830.51 7251.46,6830.51
  region net IN_D-: 7250.56,6772.36 7251.46,6779.33 7239.65,6779.33 7240.56,6772.36
  region net IN_D+: 7220.87,6834.85 7219.96,6830.51 7231.77,6830.51 7230.87,6834.85
  region net IN_D+: 7230.87,6772.36 7231.77,6779.33 7219.96,6779.33 7220.87,6772.36
  region net CC2: 7181.5,6834.22 7180.59,6830.51 7192.4,6830.51 7191.5,6834.22
  region net VDD18: 7115.71,6285 7115.71,6275 7127.41,6262.5 7127.41,6297.5
  region net VDD33: 7116.8,6185.72 7122.06,6176.84 7150.19,6187.28 7127.41,6214
  region net XOUT: 6990.16,6349.45 6990.16,6339.45 6991.47,6326.95 6991.47,6361.95
  region net XIN: 6933.27,6236.93 6943.27,6236.93 6955.77,6251.93 6920.77,6251.93
  region net XOUT: 6986.8,6224.28 6997.41,6196 7020.19,6222.72 6991.9,6233.32
  region net XIN: 6960.71,6200 6960.71,6210 6954.02,6222.5 6954.02,6187.5
  region net XIN: 6933.27,6237.72 6922.53,6222.72 6954.02,6222.72 6943.27,6237.72
  region net 4_D-: 5695.44,4884.63 5696.34,4889.49 5684.53,4889.49 5685.44,4884.63
  region net 4_D+: 5705.13,4881.7 5715.13,4881.7 5716.03,4889.49 5704.22,4889.49
  region net 4_D-: 5724.95,4874.49 5734.95,4874.49 5735.71,4889.49 5723.9,4889.49
  region net 4_D-: 5734.81,4947.64 5724.81,4947.64 5723.9,4940.67 5735.71,4940.67
  region net 4_D+: 5754.5,4881.35 5755.4,4889.49 5743.59,4889.49 5744.5,4881.35
  region net 4_D+: 5754.5,4947.64 5744.5,4947.64 5743.59,4940.67 5755.4,4940.67
  region net CC2_#: 5794.47,4874.49 5794.77,4889.49 5782.96,4889.49 5784.47,4874.49
  region net IN_D+: 7257.73,6854.68 7260.24,6844.55 7270.24,6844.97 7272.48,6855.29
  region net IN_D+: 7200.1,6850.18 7209.01,6844.63 7216.08,6851.7 7210.54,6860.62
  region net CC2: 7219.2,6972.38 7208.98,6970 7208.98,6960 7219.2,6957.62
  region net CC1: 7287.3,6959.89 7288.98,6949.21 7298.98,6947.42 7301.84,6957.29
  region net CC1_#: 5678.68,4768.77 5673.91,4770.17 5666.84,4763.1 5668.24,4758.33
  region net CC2_#: 5774.52,4760.89 5780.06,4769.8 5772.99,4776.87 5764.08,4771.33
  region net 4_D-: 5737.34,4865.6 5734.95,4875.82 5724.95,4875.82 5722.57,4865.6
  region net 4_D-: 5723.7,4811.7 5714.34,4816.81 5711.85,4805.16 5720.61,4797.26
  region net IN_D-: 7305.38,6108.09 7305.38,6098.09 7307.5,6085.59 7307.5,6120.59
  region net IN_D+: 7282.31,6098.09 7282.31,6108.09 7279.55,6120.59 7279.55,6085.59
  region net VDD33: 7113.53,6149.84 7107.5,6125.01 7129.55,6125.01 7123.53,6149.84
  region net VDD18: 7063.53,6143.03 7057.5,6125.01 7079.55,6125.01 7073.53,6143.03
  region net XOUT: 7013.53,6147.19 7007.5,6125.01 7029.55,6125.01 7023.53,6147.19
  region net XIN: 6987.18,6127.41 6975.58,6133.48 6979.55,6078.36 6990.16,6116.24
  region net 1_D+: 7323.53,5834.15 7329.55,5852.18 7307.5,5852.18 7313.53,5834.15
  region net 1_D-: 7273.53,5834.15 7279.55,5852.18 7257.5,5852.18 7263.53,5834.15
  region net 2_D+: 7223.53,5834.15 7229.55,5852.18 7207.5,5852.18 7213.53,5834.15
  region net 2_D-: 7173.53,5834.15 7179.55,5852.18 7157.5,5852.18 7163.53,5834.15
  region net 3_D+: 7123.53,5834.15 7129.55,5852.18 7107.5,5852.18 7113.53,5834.15
  region net 3_D-: 7073.53,5834.15 7079.55,5852.18 7057.5,5852.18 7063.53,5834.15
  region net 4_D+: 7023.53,5834.15 7029.55,5852.18 7007.5,5852.18 7013.53,5834.15
  region net 4_D-: 6973.53,5834.15 6979.55,5852.18 6957.5,5852.18 6963.53,5834.15
  text "两个定位孔之间的距离" at 6893.24,3480.08 h135.94
  text "外壳中心间距，整体距离还需加上壁厚" at 6260.61,3025.08 h135.94
Bottom Layer:
  region net +5V: 7137.63,6718.18 7137.63,6718.13 7137.66,6718.16 7137.66,6718.29 7137.62,6718.25 7137.62,6718.21
  region net +5V: 7137.63,6718.13 7137.63,6667.86 7149.06,6656.42 7332.98,6656.42 7343.84,6667.28 7343.84,6708.39 7334.03,6718.21 7137.7,6718.21 7137.66,6718.16
  region net +5V: 7295.39,6718.04 7295.48,6718.04 7295.49,6718.06 7295.56,6718.06 7295.12,6718.06 7295.49,6718.43 7297.59,6718.43 7296.61,6717.45 7296.61,6716.83
  region net +5V: 7296.61,6717.45 7295.06,6715.9 7294.75,6715.9 7296.3,6717.45
  region net +5V: 7296.08,6715.04 7296.63,6715.59 7296.7,6715.59 7296.2,6715.1 7296.2,6714.17 7294.47,6714.17 7295.34,6715.04
  region net +5V: 7295.56,6718.06 7295,6718.06 7294.82,6718.25 7295,6718.43 7295.37,6718.43 7295.62,6718.19 7295.62,6718.06
  region net +5V: 7295.48,6718.04 7415.06,6718.04 7477.56,6655.55 7477.56,6591.49 7474.75,6588.67 7410.69,6588.67 7342.67,6656.69 7292.99,6656.69 7292.99,6715.56
  region net +5V: 7295.38,6718.04 7295.39,6718.04
  region net +5V: 7295.39,6718.04 7295.38,6717.94 7295.49,6717.94
  region net +5V: 7295.38,6717.94 7295.14,6715.22 7294.82,6718.18 7295.06,6717.94
  region net +5V: 7294.82,6718.18 7294.75,6718.8 7294.69,6718.74 7294.69,6718.31
  region net +5V: 7208.71,6127.26 7208.72,6127.26 7208.72,6127.27
  region net +5V: 7228.46,5985.2 7228.5,5985.16 7228.42,5985.08 7228.42,5985.25 7228.51,5985.25
  region net +5V: 7228.42,5985.25 7228.42,5985.3 7228.37,5985.25
  region net +5V: 7228.37,5985.25 7228.31,5985.19 7228.31,5985.25
  region net +5V: 7228.5,5985.16 7240.71,5972.95 7275.13,5972.95 7282.63,5980.44 7282.63,6022.36 7476.66,6216.39 7476.66,6655.84 7410.14,6655.84 7409.68,6655.38 7409.68,6215.38 7228.5,6034.2 7228.5,5985.16
  region net "": 7117.93,6830.47 7117.94,6830.47 7117.94,6830.49
  region net +5V: 6677.19,5189.25 6677.19,5153.56 6677.49,5153.25 8680.02,5153.25 8680.08,5153.31 8680.08,5193.63 8680.42,5193.97 6679.83,5193.97 6677.31,5191.46 6677.31,5189.37 6677.25,5189.3
  region net +5V: 7275.87,6028.49 7282.55,6021.81 7282.55,5230.53 7317.39,5195.69 7317.39,5153.01 7191.94,5153.01 7191.34,5153.62 7191.34,5192.69 7225.25,5226.6 7225.25,6025.43 7228.31,6028.49
  region net +5V: 5600.07,5038.63 5598.26,5039.6 5601.69,5037.52
  region net +5V: 5598.26,5039.6 5598.24,5039.59 5598.23,5039.6
  region net +5V: 5598.24,5039.59 5589.05,5030.39 5589.05,5003.81 5608.03,4984.83 5840.85,4984.83 5851.33,4995.31 5851.33,5027.88 5851.55,5028.11 5840.16,5039.5 5598.33,5039.5
  region net +5V: 6676.57,5191.1 6725.26,5191.1 6733.46,5182.9 6733.46,5157.78 6631.62,5055.94 5910.98,5055.94 5839.98,4984.94 5811.28,4984.94 5797.95,4998.27 5797.95,5038.25 5798.64,5038.94 5839.3,5038.94 5909.48,5109.12 6583.71,5109.12 6665.65,5191.05 6676.61,5191.05
  region net IN_D+: 7257.28,6867.8 7247.37,6865 7248.9,6855 7259.52,6853.21
  region net IN_D+: 7207.22,6852.62 7217.45,6855 7217.45,6865 7207.22,6867.38
  region net 4_D-: 5721.7,4853.72 5723.52,4843.12 5733.52,4841.65 5736.31,4851.57
  region net 4_D-: 5735.9,4809.63 5733.52,4819.85 5723.52,4819.85 5721.14,4809.63

## Silkscreen, mask and mechanical layers (free items; w line width, h text height)
Top Solder Mask Layer:
  lines w31.5 net "": 4893.19,4992.76 4893.19,6725.04
Bottom Solder Mask Layer:
  lines w55.12 net "": 4893.19,4992.76 4893.19,6725.04
Mechanical Layer:
  circle w1 net "": c4893.19,6882.52 r78.74
  circle w1 net "": c4893.19,4835.28 r78.74
  circle w1 net "": c9617.6,4835.28 r78.74
  circle w1 net "": c9617.6,6882.52 r78.74